# EAGLE board V0p2_Main_PCB2 (EAGLE 6.4)
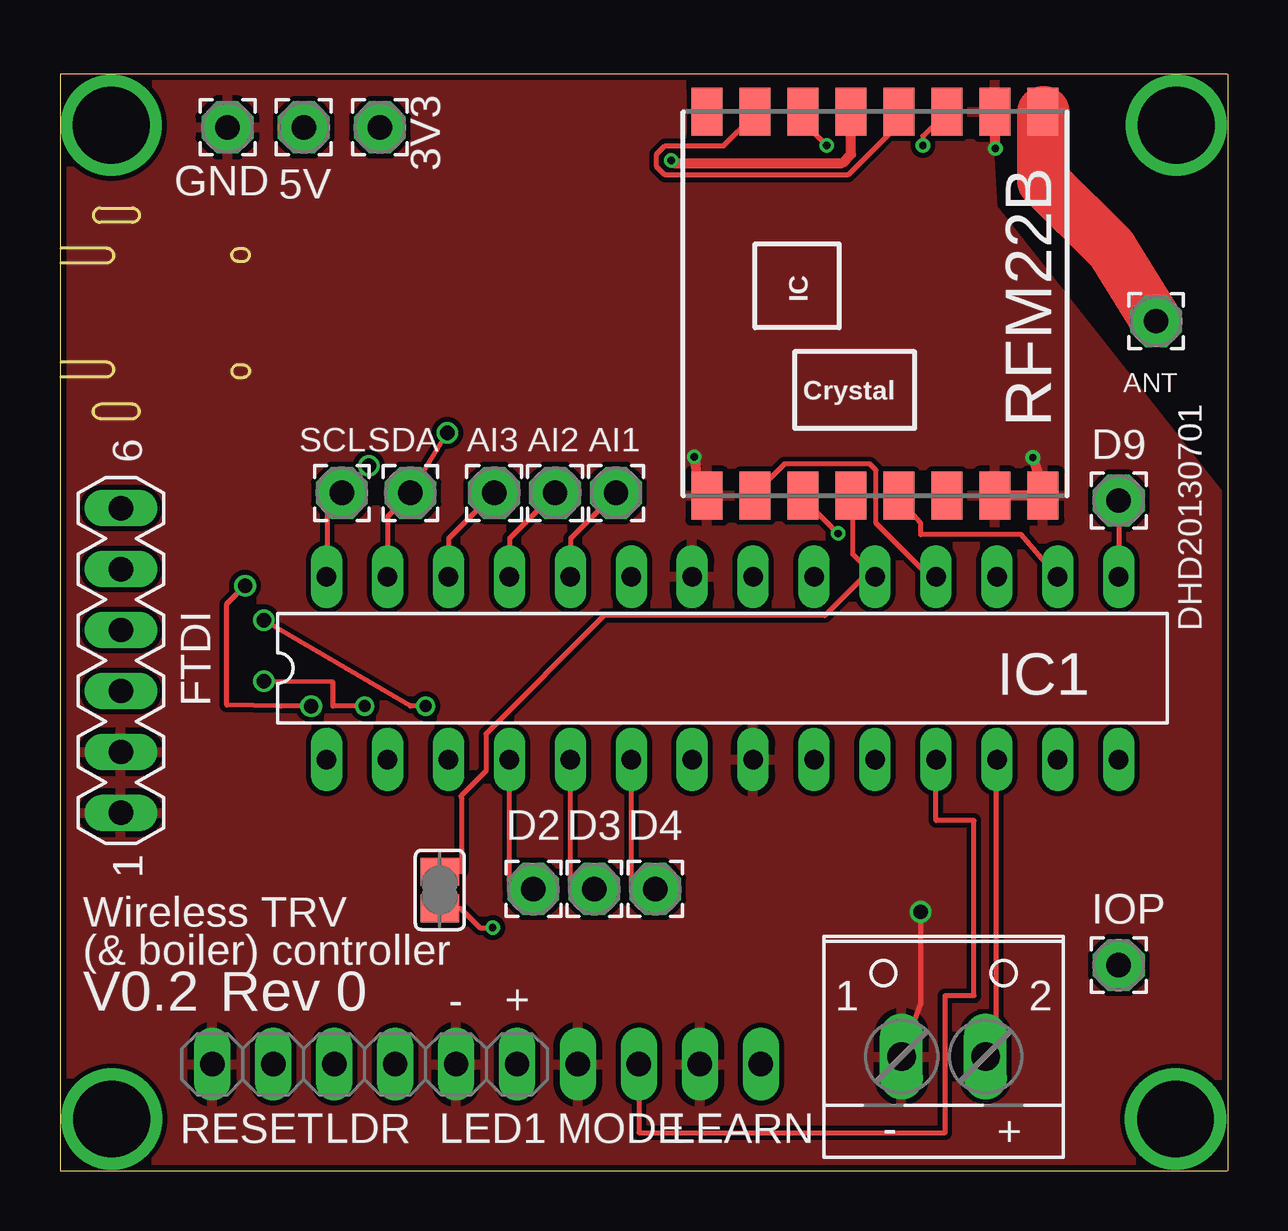
[diagram p0: board, top side]
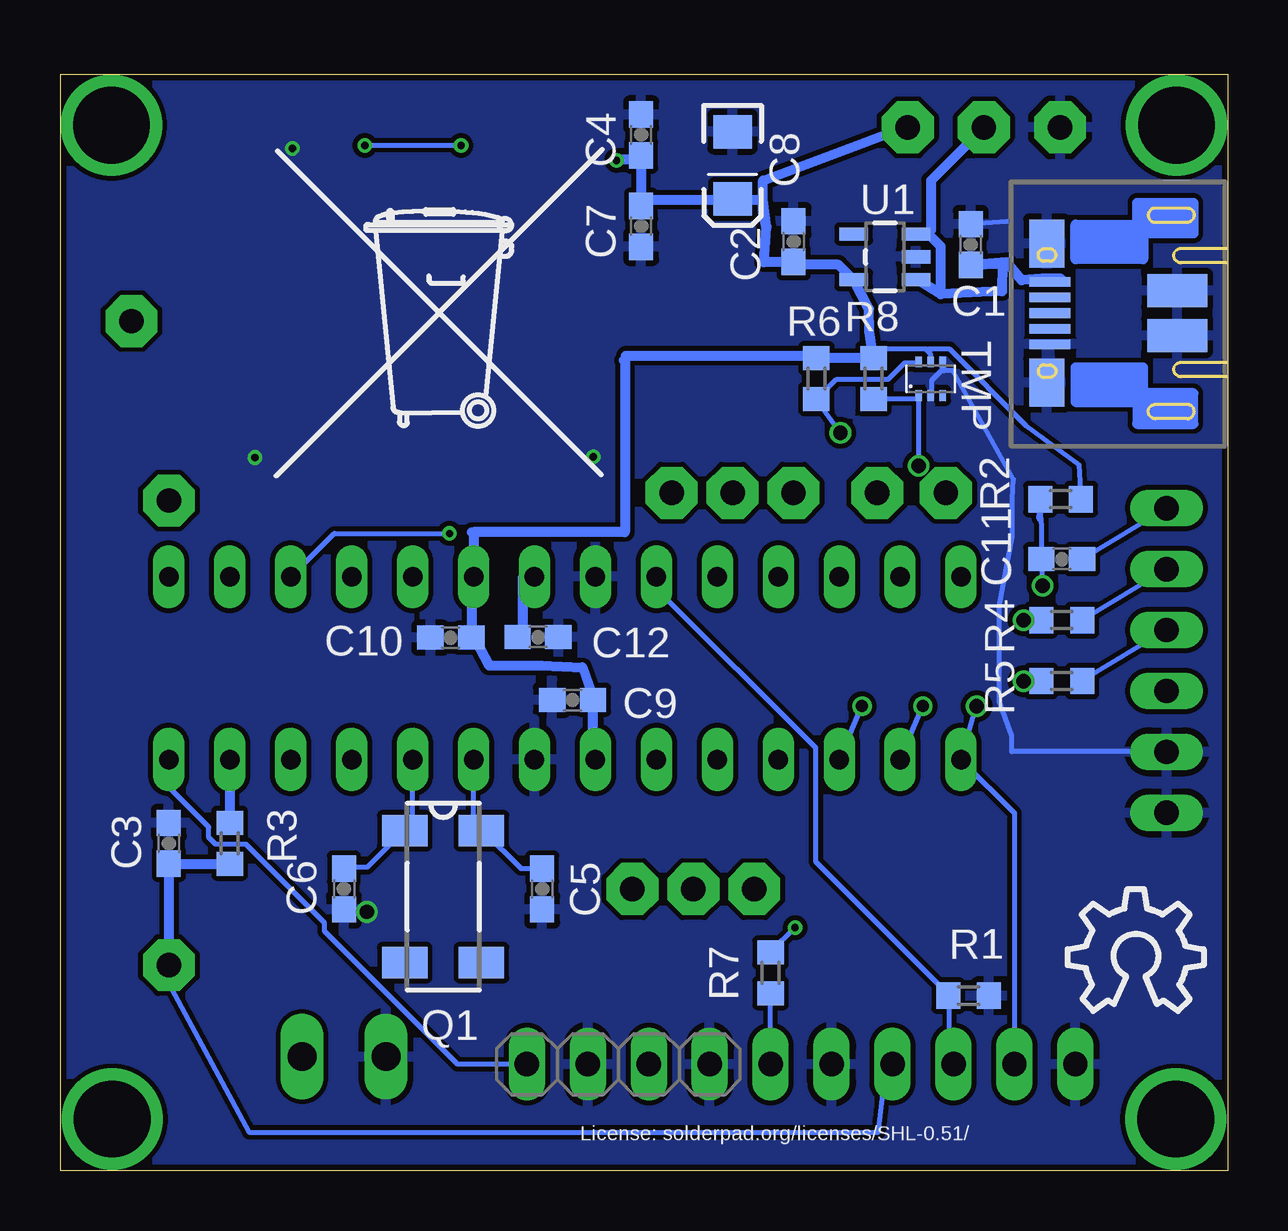
[diagram p1: board, bottom side, seen from below]

Size 48.67 x 45.71 mm. Coordinates in mm from the lower left corner, seen from the top.
Outline: 48.66,0 0,0 0,45.71 48.66,45.71
Outline: 48.67,45.71 48.67,0
Copper layers (1*16): Top 0.035mm / dielectric 1.5mm / Bottom 0.035mm
Design rules "PMServicesStd": minimum track width 8mil, minimum drill 12mil, track to track 8mil, track to pad 8mil, pad to pad 8mil, via to via 8mil, smd to smd 0mil, copper to edge 10mil, drill to drill 10mil, minimum pad ring 10mil, minimum via ring 6mil, stop-mask expansion 2mil, vias tented up to drill 100mil, thermal gap 10mil
Net classes: 1 supply: width 0.406 mm

## Footprints (pad centres in the part's own frame; a part is rotated, then mirrored left to right if it is on the bottom)
2,15/1,0 = drill 1.016 pad 2.159 octagon: 1 0,0
SCREWTERMINAL = drill 1.194 long: 1 -1.75,-1.27; 2 1.75,-1.27
0603-CAP = smd 1.1 x 1: 1 -0.85,0; 2 0.85,0
EIA3216 = smd 1.4 x 1.6: A 1.4,0; C -1.4,0
MA06-1 = drill 1.016 long: 1 -6.35,0; 2 -3.81,0; 3 -1.27,0; 4 1.27,0; 5 3.81,0; 6 6.35,0
DIL28-3 = drill 0.813 long: 1 -16.51,-3.81; 2 -13.97,-3.81; 3 -11.43,-3.81; 4 -8.89,-3.81; 5 -6.35,-3.81; 6 -3.81,-3.81; 7 -1.27,-3.81; 8 1.27,-3.81; 9 3.81,-3.81; 10 6.35,-3.81; 11 8.89,-3.81; 12 11.43,-3.81; 13 13.97,-3.81; 14 16.51,-3.81; 15 16.51,3.81; 16 13.97,3.81; 17 11.43,3.81; 18 8.89,3.81; 19 6.35,3.81; 20 3.81,3.81; 21 1.27,3.81; 22 -1.27,3.81; 23 -3.81,3.81; 24 -6.35,3.81; 25 -8.89,3.81; 26 -11.43,3.81; 27 -13.97,3.81; 28 -16.51,3.81
MICRO-USB-FCI-10103592 = smd 0.4 x 1.71: 1 3.84,2.51; 2 3.19,2.51; 3 2.54,2.51; 4 1.89,2.51; 5 1.24,2.51 | smd 2 x 1.46: 7 -0.36,2.64; 17 5.44,2.64 | smd 1.375 x 2.5: 11 1.603,-2.79; 12 3.478,-2.79
1X02 = drill 1.016 long: 1 -1.27,0; 2 1.27,0
MC-306 = smd 1.3 x 1.9: 1 -2.75,-1.6; 2 2.75,-1.6; 3 2.75,1.6; 4 -2.75,1.6
R0603 = smd 1 x 1.1: 1 -0.85,0; 2 0.85,0
RFM22-XXX-S2 = smd 2 x 1.3: 1 -8,7; 2 -8,5; 3 -8,3; 4 -8,1; 5 -8,-1; 6 -8,-3; 7 -8,-5; 8 -8,-7; 9 8,-7; 10 8,-5; 11 8,-3; 12 8,-1; 13 8,1; 14 8,3; 15 8,5; 16 8,7
SJ = smd 1.168 x 1.6: 1 -0.762,0; 2 0.762,0
TMP112 = smd 0.285 x 0.45: 1 -0.5,-0.7; 2 0,-0.7; 3 0.5,-0.7; 4 0.5,0.7; 5 0,0.7; 6 -0.5,0.7
TC1185 = smd 0.55 x 1.2: 1 -0.95,-1.3; 2 0,-1.3; 3 0.95,-1.3; 4 0.95,1.3; 5 -0.95,1.3

## Placement (x,y rotation side)
3V3  [2,15/1,0]  13.34,43.5 90 top
5V  [2,15/1,0]  10.16,43.5 180 top
-  BOILER  [SCREWTERMINAL]  36.83,6.03 0 top
AI1  [2,15/1,0]  23.18,28.26 0 top
AI2  [2,15/1,0]  20.64,28.26 0 top
AI3  [2,15/1,0]  18.1,28.26 0 top
ANT  ANT (86 mm)  [2,15/1,0]  45.69,35.42 180 top
C1  10uF 10V  [0603-CAP]  10.71,38.61 90 bottom
C2  10uF 10V  [0603-CAP]  18.1,38.73 270 bottom
C3  100nF  [0603-CAP]  44.13,13.65 270 bottom
C4  100pF  [0603-CAP]  24.45,43.18 90 bottom
C5  0pF  [0603-CAP]  28.57,11.75 270 bottom
C6  0pF  [0603-CAP]  36.83,11.75 270 bottom
C7  100nF  [0603-CAP]  24.45,39.37 90 bottom
C8  100uF  [EIA3216]  20.64,41.91 270 bottom
C9  100nF  [0603-CAP]  27.3,19.63 180 bottom
C10  100nF  [0603-CAP]  32.38,22.23 180 bottom
C11  100nF  [0603-CAP]  6.92,25.5 0 bottom
C12  100nF  [0603-CAP]  28.75,22.25 0 bottom
D2  [2,15/1,0]  19.73,11.75 0 top
D3  [2,15/1,0]  22.27,11.75 0 top
D4  [2,15/1,0]  24.81,11.75 0 top
D9  [2,15/1,0]  44.13,27.94 0 top
FTDI  FTDI  [MA06-1]  2.54,21.27 90 top
GND  [2,15/1,0]  6.99,43.5 180 top
IC1  ATMEGA328P-PU  [DIL28-3]  27.62,20.95 0 top
IOP  [2,15/1,0]  44.13,8.57 0 top
JP1  MICRO-USB-FCI-10103592  [MICRO-USB-FCI-10103592]  4.9,33.21 90 bottom
LDR  [1X02]  12.7,4.45 0 top
LEARN  [1X02]  27.94,4.45 0 bottom
LED1  [1X02]  17.78,4.45 0 top
MODE  [1X02]  22.86,4.45 0 bottom
Q1  32768Hz  [MC-306]  32.7,11.43 270 bottom
R1  100K  [R0603]  10.79,7.3 0 bottom
R2  10K  [R0603]  6.96,28 180 bottom
R3  330R  [R0603]  41.59,13.65 270 bottom
R4  10K  [R0603]  6.92,22.96 0 bottom
R5  10K  [R0603]  6.92,20.42 0 bottom
R6  4K7  [R0603]  17.14,33.02 270 bottom
R7  470R  [R0603]  19.05,8.26 270 bottom
R8  4K7  [R0603]  14.76,33.02 90 bottom
RESET  [1X02]  7.62,4.45 0 top
RFM22B  RFM22SMD  [RFM22-XXX-S2]  33.97,36.14 270 top
SCL  [2,15/1,0]  11.75,28.26 0 top
SDA  [2,15/1,0]  14.61,28.26 0 top
SJ1  [SJ]  15.83,11.71 270 top
TMP  TMP112  [TMP112]  12.38,33.02 0 bottom
U1  TC1185SMD  [TC1185]  14.29,38.1 90 bottom
U$1  [OSHW_10X200_NOTEXT]  6.67,6.67 0 bottom
U$2  [TONNE]  33.02,33.02 0 bottom

## Library data of the parts
3V3 5V AI1-AI3 ANT D2-D4 D9 GND IOP SCL SDA = wirepad
- = screwterminal; MPN: 237-102; OC_FARNELL: unknown; OC_NEWARK: 70K9898
C1-C12 = SparkFun-Passives
FTDI = FTDI; OC_FARNELL: unknown; OC_NEWARK: unknown
IC1 = Arduino-AVR
JP1 = micro-usb-fci-10103592
LDR LEARN LED1 MODE RESET = pinhead
Q1 = crystal; MPN: MC-306 60.0KHZ 100PPM ,12.5PF; OC_FARNELL: 1278040; OC_NEWARK: 31M5576
R1-R8 = resistor
RFM22B = SparkFun-RF
SJ1 = jumper
TMP = TMP112
U1 = 3.3VREG
U$1 = ohw-logo
U$2 = logo

## Nets
5V [supply]: 5V.1 C1.1 JP1.1 U1.1 U1.3
AI1: AI1.1 IC1.24
AI2: AI2.1 IC1.25
AI3: AI3.1 IC1.26
BOILER: -.2 IC1.12
BUTTON_LEARN_L: IC1.14 LEARN.1
BUTTON_MODE_L: IC1.11 MODE.1
D2: D2.1 IC1.4
D3: D3.1 IC1.5
D4: D4.1 IC1.6
D9: D9.1 IC1.15
GND: -.1 C1.2 C2.1 C3.1 C4.2 C5.2 C6.2 C7.1 C8.C C9.2 C10.2 C12.2 FTDI.1 FTDI.2 GND.1 IC1.8 IC1.22 JP1.5 JP1.7 JP1.11 JP1.12 JP1.17 LEARN.2 LED1.1 MODE.2 R1.2 RESET.1 RFM22B.2 RFM22B.9 RFM22B.15 RFM22B.16 TMP.2 TMP.4 U1.2
IO_POWER: C3.2 IOP.1 LDR.2 R3.2
IO_POWER_UP: IC1.13 R3.1
LDR: IC1.23 LDR.1 R1.1
LED_HEATCALL: R7.1 SJ1.2
LEDEXT: LED1.2 R7.2
N$1: C11.2 FTDI.6
N$3: FTDI.4 R5.2
N$5: FTDI.5 R4.2
N$6: C12.1 IC1.21
N$20: RFM22B.3 RFM22B.6
N$21: RFM22B.4 RFM22B.7
N$26: ANT.1 RFM22B.1
RESET: C11.1 IC1.1 R2.2 RESET.2
RX: IC1.3 R4.1
SCL: IC1.28 R8.1 SCL.1 TMP.1
SDA: IC1.27 R6.2 SDA.1 TMP.6
SPI_MISO: IC1.18 RFM22B.10
SPI_MOSI: IC1.17 RFM22B.11
SPI_NSS: IC1.16 RFM22B.13
SPI_SCK: IC1.19 RFM22B.12 SJ1.1
TX: IC1.2 R5.1
VCC: 3V3.1 C2.2 C4.1 C7.2 C8.A C9.1 C10.1 IC1.7 IC1.20 R2.1 R6.1 R8.2 RFM22B.5 TMP.5 U1.5
XTAL1: C5.1 IC1.9 Q1.4
XTAL2: C6.1 IC1.10 Q1.1

## Tracks (layer width: path | path; a pad name or v marks a point on that pad's centre or on a via)
5V
  Bottom 0.406: JP1.1 6.93,37.19 7.77,37.19 8.58,37.12 9.2,37.87 C1.1 9.4,37.8 9.41,36.66 11.96,36.53 | 11.96,36.53 12.98,37.16 U1.1 | 12.47,39.04 12.98,39.04 U1.3 | 12.47,39.04 11.96,38.53 11.96,36.53 | 12.47,39.04 12.37,39.22 12.37,41.27 10.16,43.48 5V.1
AI1
  Top 0.203: AI1.1 21.29,26.36 21.29,24.77 IC1.24
AI2
  Top 0.203: AI2.1 18.75,26.36 18.75,24.77 IC1.25
AI3
  Top 0.203: AI3.1 16.2,26.36 16.2,24.77 IC1.26
BOILER
  Top 0.203: IC1.12 39.04,5.23 38.58,4.78 -.2
BUTTON_LEARN_L
  Bottom 0.203: LEARN.1 32.11,4.45 37.64,9.98 37.64,10.34 40.92,13.61 42.19,13.61 42.47,13.89 42.47,14.33 44.12,15.98 IC1.14
BUTTON_MODE_L
  Top 0.203: MODE.1 24.13,1.59 36.89,1.59 36.89,7.3 38.1,7.3 38.1,14.61 36.51,14.61 36.51,16.82 36.5,16.82 IC1.11
D2
  Top 0.203: IC1.4 18.75,17.14 18.75,11.76 D2.1
D3
  Top 0.203: IC1.5 21.29,17.14 21.29,11.76 D3.1
D4
  Top 0.203: IC1.6 23.82,17.14 23.82,11.76 D4.1
D9
  Top 0.203: IC1.15 44.15,24.77 44.15,27.94 D9.1
GND  (via drill 0.3, 0.6)
  Top 0.203: 38.99,28.14 RFM22B.15 | RFM22B.16 41.07,28.14 | RFM22B.2 38.99,44.04 | RFM22B.9 26.9,28.07 26.64,28.07 | -.1 35.88,6.99 v35.88,10.79
  Top 0.406: RFM22B.16 38.99,28.14 | v38.99,42.62 38.99,44.04 | v40.55,29.73 41.07,28.14 | v26.44,29.77 26.64,28.07
  Bottom 0.203: 12.39,32.31 TMP.2 | 36.88,10.87 C6.2 | C6.2 36.88,10.85 | C6.2 | C6.2 36.88,10.9 | 11.89,33.71 TMP.4 11.89,33.6 11.89,33.4 | 12.34,32.41 TMP.2 | 11.89,33.4 12.34,32.94 12.34,32.51 TMP.2 | 11.89,33.4 11.81,33.35 11.46,33.35 8.93,28.83 8.98,28 8.98,26.45 9.52,23.54 9.52,19.57 9,18.12 9,17.48 2.54,17.48 FTDI.2 | 9.2,39.57 C1.2 | v35.88,10.79 C6.2
  pour Bottom: 0,0 48.67,0 48.67,45.72 0,45.72
  pour Top: 0,45.75 -0.1,45.88 -0.1,0.12 48.88,0 48.75,27.62 38.88,40.12 38.75,42.25 39.12,45.5
IO_POWER
  Bottom 0.203: 41.6,12.8 R3.2 | C3.2 44.12,12.7 | 44.12,8.59 IOP.1 44.02,8.41 44.02,7.59 40.79,1.62 14.55,1.62 14.22,4.45 LDR.2
  Bottom 0.406: C3.2 41.6,12.8 | 44.12,8.59 44.12,12.7
IO_POWER_UP
  Bottom 0.203: 41.6,14.5 R3.1 | 41.6,17.14 IC1.13
  Bottom 0.406: 41.6,17.14 41.6,14.5
LDR
  Bottom 0.203: R1.1 | LDR.1 11.61,4.62 11.61,7.19 R1.1 | IC1.23 23.8,24.26 17.17,17.63 17.17,12.88 11.68,7.39 R1.1
LED_HEATCALL  (via drill 0.3)
  Top 0.203: v18.03,10.13 17.5,10.13 16.71,10.92 SJ1.2
  Bottom 0.203: v18.03,10.13 R7.1
LEDEXT
  Bottom 0.203: LED1.2 R7.2
N$1
  Bottom 0.203: C11.2 2.54,27.64 FTDI.6
N$3
  Bottom 0.203: R5.2 2.54,22.55 FTDI.4
N$4  (via drill 3.2)
  other vias: 2.13,43.59
N$5
  Bottom 0.203: R4.2 2.54,25.09 FTDI.5
N$6
  Bottom 0.203: 28.96,24.71 28.91,24.77 IC1.21
  Bottom 0.406: C12.1 29.38,22.25 29.38,24.75 IC1.21
N$12  (via drill 3.2)
  other vias: 46.5,2.16
N$19  (via drill 3.2)
  other vias: 46.53,43.59
N$20  (via drill 0.3)
  Top 0.203: 30.99,43.74 30.99,44.12 RFM22B.6 31.04,43.66 v31.95,42.75 | v35.97,42.75 35.97,43.13 36.96,44.12 RFM22B.3
  Bottom 0.203: v35.97,42.75 v31.95,42.75
N$21
  Top 0.203: 28.96,44.04 28.96,44.12 RFM22B.7 28.91,43.97 27.66,42.72 25.22,42.72 24.87,42.37 24.87,41.86 25.22,41.5 32.84,41.5 34.9,43.56 34.9,43.69 RFM22B.4 34.95,44.12 34.95,43.76
N$22  (via drill 3.2)
  other vias: 2.16,2.16
N$26
  Top 0.203: 41,44.12 RFM22B.1
  Top 2.184: 41,44.12 41,41.25 43.81,38.43 ANT.1
RESET  (via drill 0.6)
  Top 0.203: v7.72,24.39 6.96,23.63 6.96,19.41 9.21,19.37 v10.47,19.37
  Bottom 0.203: 7.77,27.09 7.87,27.19 R2.2 7.77,27.01 7.77,25.61 C11.1 | C11.1 | v7.72,24.39 7.72,25.41 C11.1 | v10.47,19.37 IC1.1 11.05,17.07 8.89,14.91 RESET.2
RX  (via drill 0.5, 0.6)
  Top 0.203: v15.24,19.37 14.61,19.37 v8.51,22.95
  Bottom 0.203: v8.51,22.95 7.77,22.95 R4.1 | IC1.3 v15.24,19.37
SCL  (via drill 0.6)
  Top 0.203: v12.88,29.39 SCL.1 11.71,28.17 11.12,27.58 11.12,24.77 IC1.28
  Bottom 0.203: 12.88,32.21 TMP.1 | 14.76,32.18 R8.1 14.66,32.18 12.95,32.18 TMP.1 | v12.88,29.39 12.88,32.11 TMP.1
SDA  (via drill 0.6)
  Top 0.203: v16.14,30.76 SDA.1 14.55,28.17 13.66,27.28 13.66,24.77 IC1.27
  Bottom 0.203: 12.9,33.71 TMP.6 13.01,33.68 13.46,33.68 14.15,32.99 16.31,32.99 17.07,32.23 R6.2 | 17.14,32.18 R6.2 | v16.14,30.76 17.09,32.08 R6.2
SPI_MISO
  Top 0.203: IC1.18 36.25,24.77 34.01,27 34.01,29.21 33.76,29.46 30.2,29.46 28.98,28.25 28.98,28.17 RFM22B.10
SPI_MOSI  (via drill 0.3)
  Top 0.203: 30.67,28.02 30.99,28.14 RFM22B.11 31.01,28.04 31.01,27.99 v32.44,26.57
  Bottom 0.203: v32.44,26.57 37.24,26.57 IC1.17
SPI_NSS
  Top 0.203: RFM22B.13 34.98,28.04 35.88,27 35.88,26.52 40.08,26.52 IC1.16
SPI_SCK
  Top 0.203: 32.99,27.51 32.99,28.14 RFM22B.12 33.05,27.43 33.05,25.7 33.91,24.84 IC1.19 33.68,24.94 31.88,23.14 22.68,23.14 17.75,18.21 17.75,16.66 16.71,15.62 16.74,15.54 16.74,12.57 16.71,12.47 SJ1.1
TX  (via drill 0.5, 0.6)
  Top 0.203: v12.7,19.37 11.38,19.37 11.38,20.38 v8.51,20.41
  Bottom 0.203: v8.51,20.41 7.77,20.41 R5.1 | IC1.2 v12.7,19.37
VCC  (via drill 0.3)
  Top 0.203: v25.48,42.11 25.58,42.01 | 32.97,44.12 RFM22B.5
  Top 0.406: 32.97,44.12 32.97,42.37 32.61,42.01 25.58,42.01
  Bottom 0.203: 24.46,40.23 C7.2 24.38,40.49 | 24.46,42.32 C4.1 24.54,42.14 | 20.65,40.49 C8.A 20.55,40.46 | 25.45,42.14 v25.48,42.11 | 18.17,37.87 C2.2 18,37.77 | 31.52,24.69 31.45,24.77 IC1.20 31.42,24.87 | C10.1 31.34,22.12 | 26.44,17.22 26.36,17.14 IC1.7 26.47,17.3 | 26.44,19.99 C9.1 | 13.49,43.48 13.34,43.48 3V3.1 | 12.39,33.73 TMP.5 12.39,33.83 12.39,34.06 12.54,34.2 | 14.76,33.88 R8.2 | 17.14,33.88 R6.1 17.2,33.78 | 14.86,33.88 R8.2 | 15.58,37.13 U1.5 15.66,37.21 | 12.54,34.2 12.6,34.27 14.63,34.27 R8.2 | R2.1 6.2,29.44 8.41,31.06 11.61,34.27 12.47,34.27 12.54,34.2 | 26.47,19.86 C9.1 | 26.54,19.99 C9.1 | 25.17,33.78 25.08,33.97
  Bottom 0.406: 24.46,42.32 24.46,40.23 | 24.38,40.49 20.65,40.49 | 24.54,42.14 25.45,42.14 | 20.55,40.46 19.38,40.46 19.21,39.34 | 19.21,39.34 19.33,37.87 18.17,37.87 | 31.52,24.69 C10.1 | 19.21,39.34 19.37,39.98 19.37,41.27 13.49,43.48 | 14.76,33.88 14.94,34.98 14.95,35.93 15.58,37.13 | 14.86,33.88 17.14,33.88 | 18,37.77 16.22,37.77 15.66,37.21 | 25.08,33.97 17.14,33.97 R6.1 | 26.47,19.86 26.47,17.3 | 26.54,19.99 26.9,20.99 28.6,21.06 30.78,21.06 31.34,22.12 | 25.17,33.78 25.12,33.78 25.12,26.62 31.43,26.62 | 31.5,26.62 31.43,26.62 | 31.43,26.62 IC1.20
XTAL1
  Bottom 0.203: 31.42,14.5 31.17,14.25 Q1.4 | 31.45,14.58 Q1.4 | C5.1 29.46,12.6 31.01,14.15 Q1.4 | C5.1 | Q1.4 31.45,14.68 31.45,17.14 IC1.9
XTAL2
  Bottom 0.203: C6.1 | 34.31,14.17 Q1.1 | 33.98,14.5 34.24,14.25 Q1.1 | C6.1 36.75,12.65 35.87,12.65 34.39,14.12 Q1.1 | Q1.1 33.98,14.58 33.98,17.14 IC1.10

## Text on the board
bPlace: License: solderpad.org/licenses/SHL-0.51/
tNames: DHD20130701 | Wireless TRV | (& boiler) controller | V0.2 | Rev 0 | + | - | - | +